# Altium PCB GNSS_FE_PROD.PcbDoc
Units mm, origin at the board's own origin, x right, y up, seen from the top; angles counter-clockwise.
Board outline 40 x 30 mm, 4 copper layers (TOP, GND1, GND2, BOTTOM), stack 1.586 mm thick; 19 components, 13 nets, 56 pads, 235 vias.
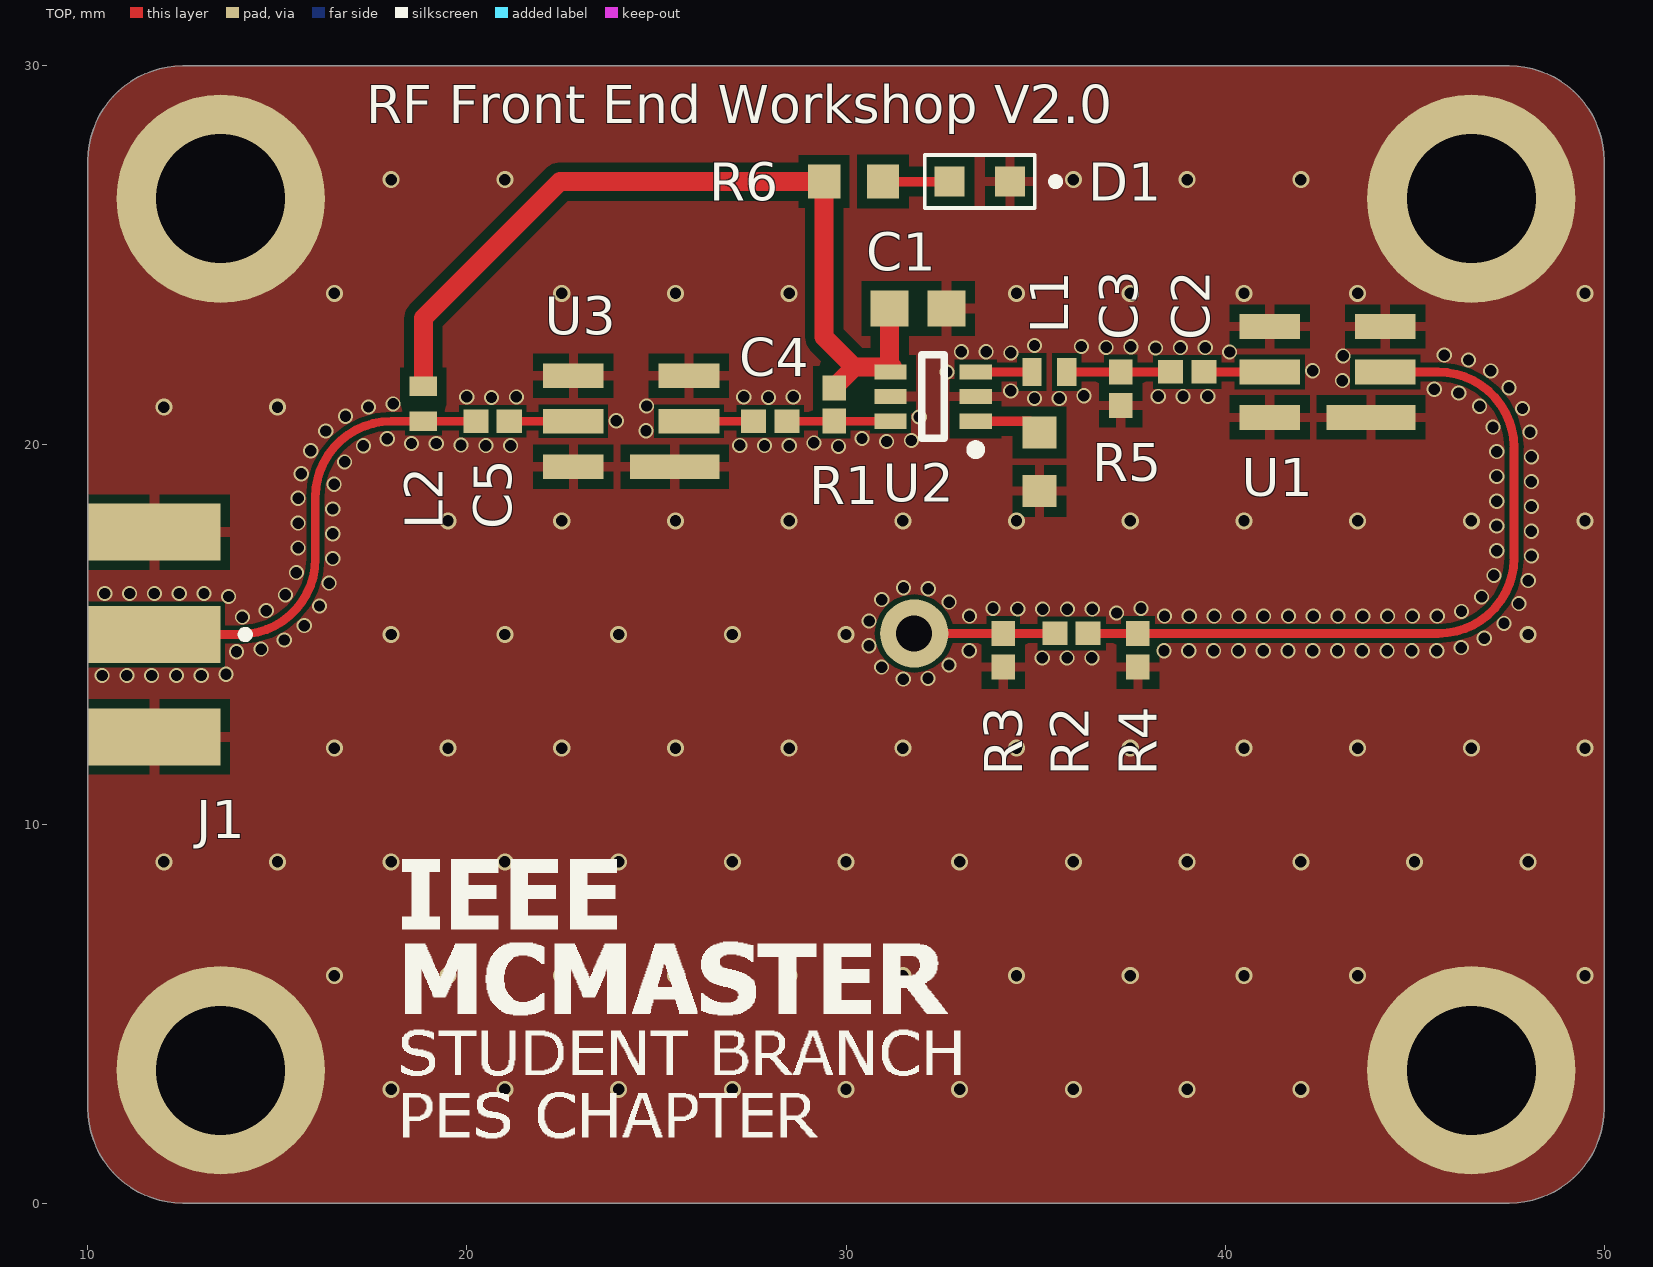
[diagram p0: TOP view]
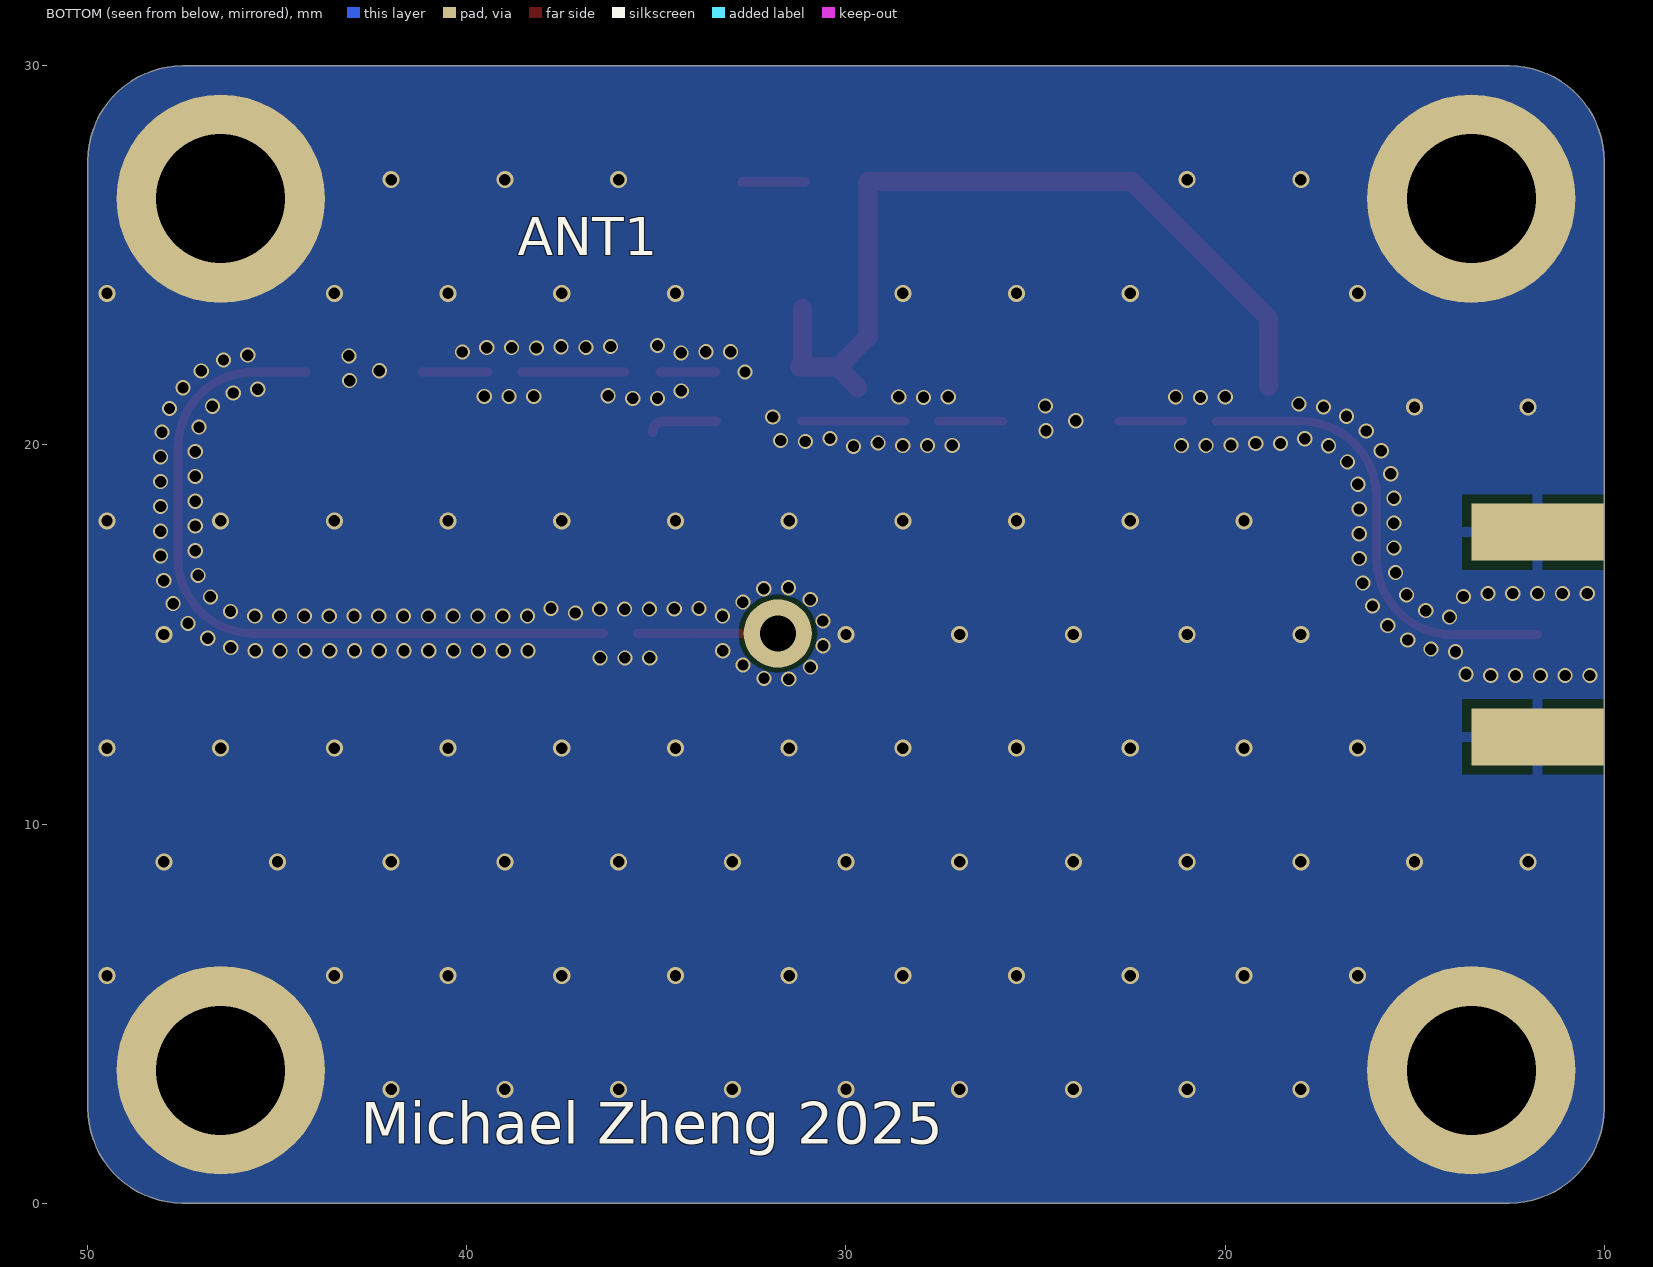
[diagram p1: BOTTOM view, seen from below]
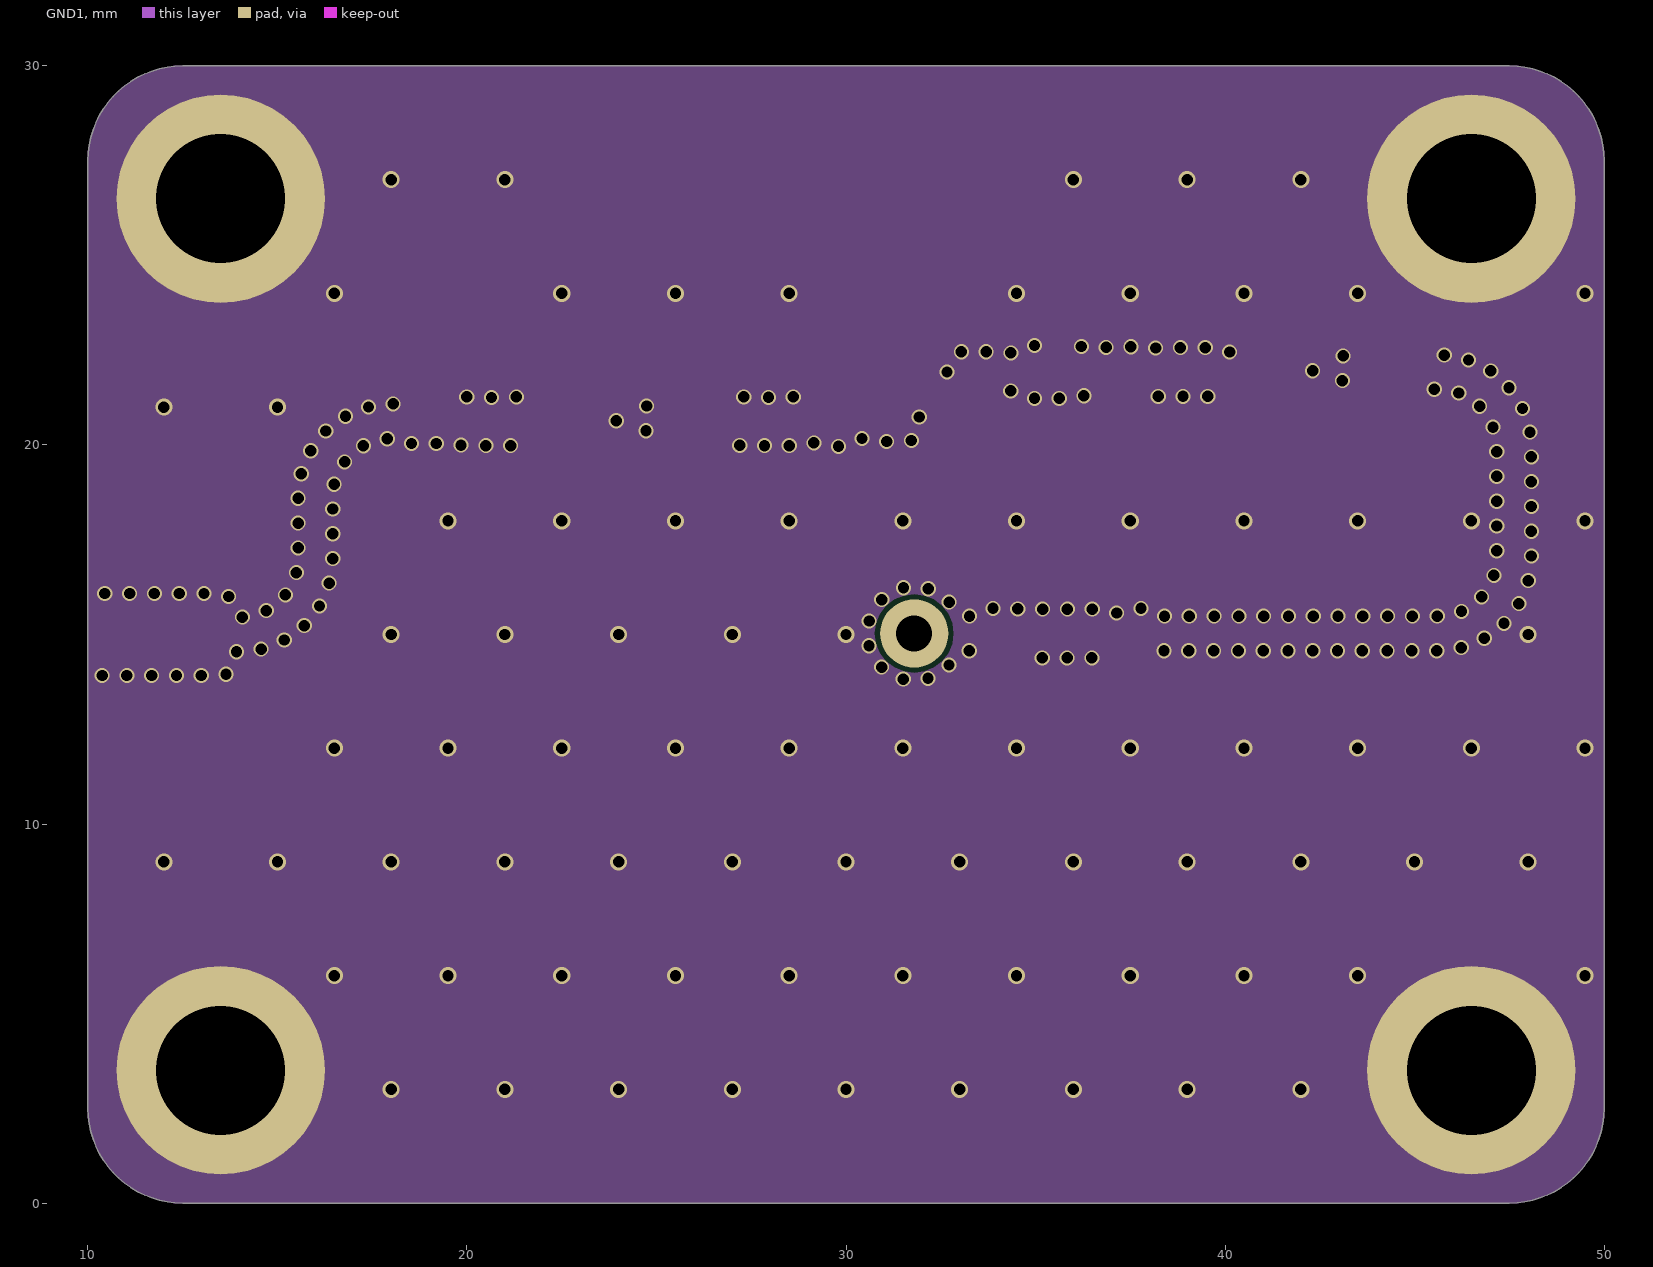
[diagram p2: GND1]
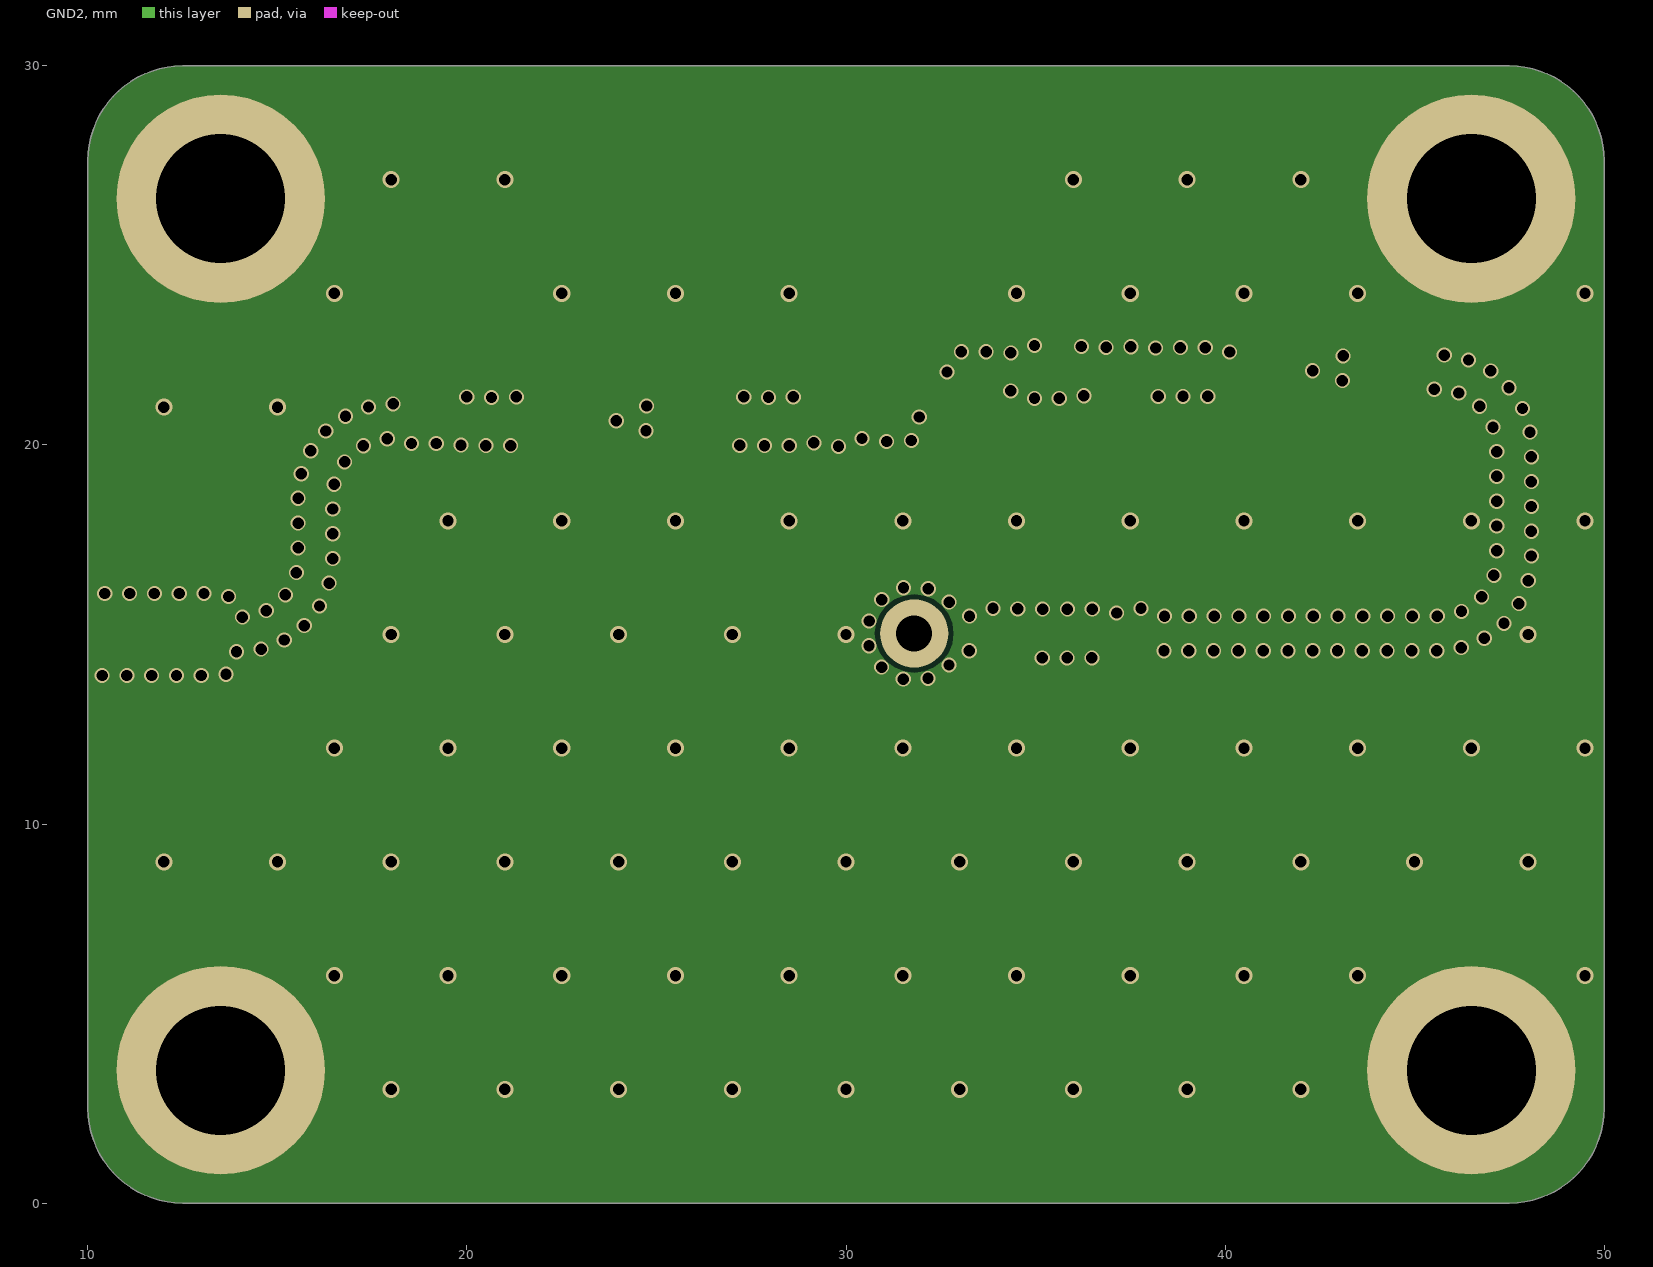
[diagram p3: GND2]
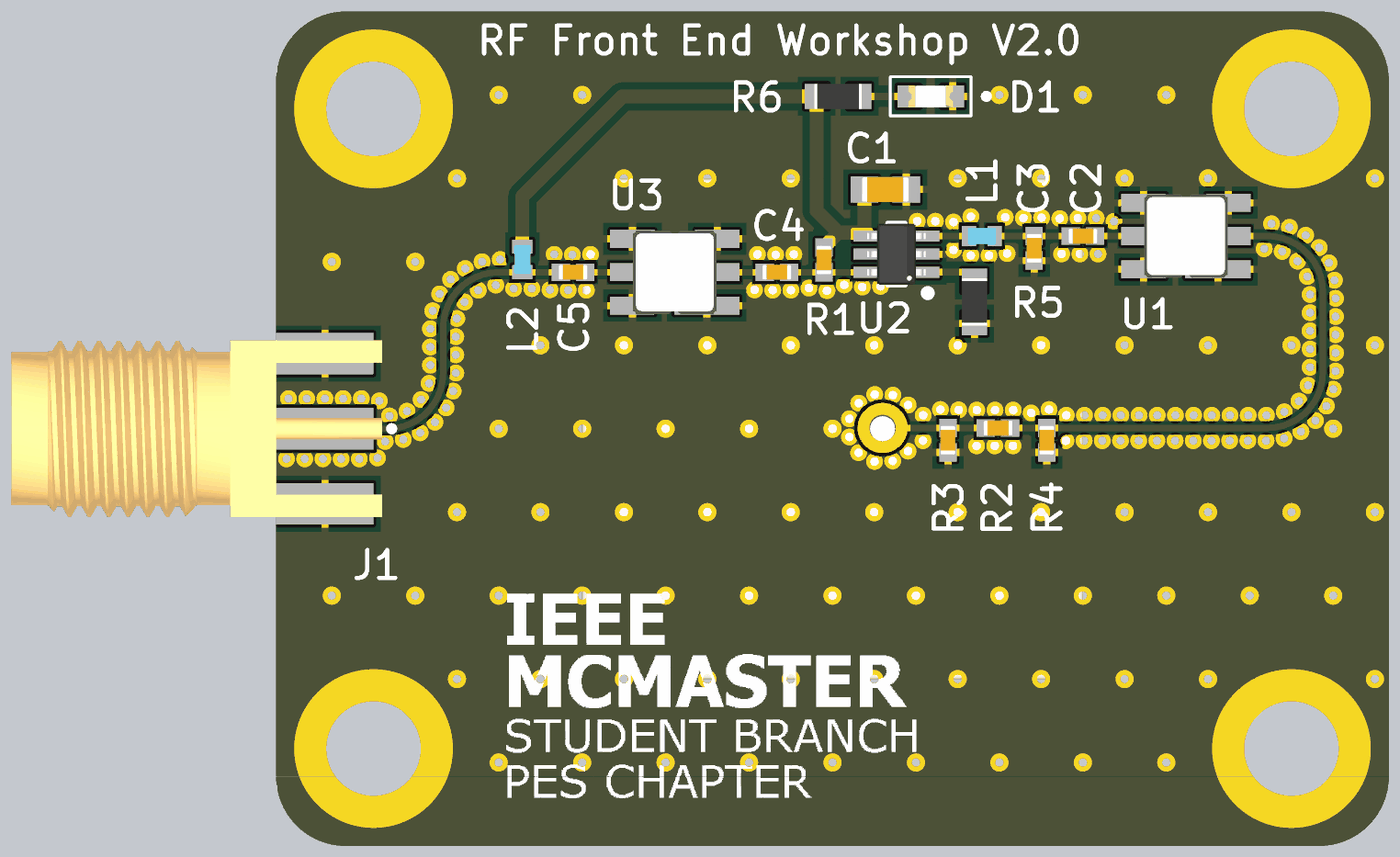
[diagram p4: 3D render of the assembled board from above, using the file's embedded part models]

## Layer stack, top to bottom
Top Solder: solder mask 0.0305, Solder Resist, Dk 3.8
TOP: signal copper 0.035
Dielectric 2: prepreg 0.2104, Core-024, Dk 4.4
GND1: signal copper 0.0152
Dielectric 1: core 1.065, Core-024, Dk 4.6
GND2: signal copper 0.0152
Dielectric 3: prepreg 0.2104, Core-024, Dk 4.4
BOTTOM: signal copper 0.035
Bottom Solder: solder mask 0.0305, Solder Resist, Dk 3.8

## Board outline
10,2.5 10,27.5 cw(c12.5,27.5) 12.5,30 47.5,30 cw(c47.5,27.5) 50,27.5 50,2.5 cw(c47.5,2.5) 47.5,0 12.5,0 cw(c12.5,2.5)

## Design rules (kind name [scope] priority, off if disabled: settings)
Clearance Clearance_RF [InNetClass('RF')] p1: gap=0.127 ignorepadtopadclearanceinfootprint=TRUE
Clearance [All] p2: gap=0.254 ignorepadtopadclearanceinfootprint=FALSE except(0.15: SMDPad-SMDPad)
HoleSize [All] p1: absolutevalues=TRUE maxlimit=5 minlimit=0.025 maxpercent=80.000 minpercent=20.000
MinimumSolderMaskSliver [All] p1: minsoldermaskwidth=0.13
PolygonConnect [All] p1: thpad.connectstyle=Relief thpad.reliefconductorwidth=0.254 thpad.reliefentries=4 thpad.polygonreliefangle="90 Angle" thpad.airgapwidth=0.254 thpad.conductorbypadedge=TRUE thpad.mindistance=0.381 thpad.enablemindistance=FALSE smdpad.connectstyle=Relief smdpad.reliefconductorwidth=0.254 smdpad.reliefentries=4 smdpad.polygonreliefangle="90 Angle" smdpad.airgapwidth=0.254 smdpad.conductorbypadedge=TRUE smdpad.mindistance=0.381 smdpad.enablemindistance=FALSE via.connectstyle=Direct via.reliefconductorwidth=0.254 via.reliefentries=4 via.polygonreliefangle="90 Angle" via.airgapwidth=0.254
RoutingVias [All] p1: holewidth=0.711 width=1.27 viastyle="Through Hole" minholewidth=0.3 minwidth=0.4 maxholewidth=0.711 maxwidth=1.27
SilkToSolderMaskClearance [IsPad] p1: minsilkscreentomaskgap=0.15 clearancetoexposedcopper=TRUE
SolderMaskExpansion [All] p1: expansion=0.102 istentingtop=FALSE
Width POWER [(InNet('GND') OR InNet('VCC'))] p1: maxlimit=0.5 minlimit=0.254 preferedwidth=0.5 minimp=50.000000 maximp=50.000000 favimp=50.000000
Width RF [InNetClass('RF')] p2: maxlimit=0.228 minlimit=0.181 preferedwidth=0.228 toplayer_minwidth=0.228 midlayer1_maxwidth=0.181 midlayer1_prefwidth=0.181 midlayer2_maxwidth=0.181 midlayer2_prefwidth=0.181 bottomlayer_minwidth=0.228 impedanceprofiledriven=TRUE impedanceprofileid={97FFBCBD-3325-4071-BD9D-E1329E5F0074} impedanceprofilevalue=50.000000 minimp=50.000000 maximp=50.000000 favimp=50.000000
Width [All] p3: maxlimit=0.254 minlimit=0.254 preferedwidth=0.254
27 further rules are at their usual default settings.

## Classes and differential pairs
net class RF: NetANT1_1 NetC2_1 NetC2_2 NetC4_1 NetC4_2 NetC5_1 NetC5_2 NetL1_1 NetR2_1

## Components (designator, comment, footprint, x,y, rotation, side; value= is the part's Value field where it differs from the comment)
ANT1 "[NO GND] ANT-GNSSCP-TH18L1" "[NO GND] ANT-GNSSCP-TH18L1" 30,15 r270 bottom locked
C1 "GCM188L81H104KA57D" CAP_MURATA_0603 31.9,23.6 r0 top
C2 "GRM1555C1H182JA01D" 0402_CAP 39.004,21.927 r180 top
C3 "GJM1555C1H1R5WB01D" 0402_CAP 37.25,21.487 r90 top
C4 "GJM1555C1H470FB01D" 0402_CAP 28,20.627 r180 top
C5 "GJM1555C1H8R1BB01D" 0402_CAP 20.675,20.627 r180 top
D1 "Red, 2V, 140°" WL-SMCW 33.529,26.95 r180 top
J1 "CON-SMA-EDGE-S" RFSOLUTIONS_CON-SMA-EDGE-S 11.75,15 r0 top
L1 "LQG15HN5N6C02D" INDC1006X60N 35.367,21.927 r0 top value=5.6nH
L2 "LQW15AN20NG8ZD" INDC1006X60N 18.85,21.087 r90 top value=20nH
R1 "RC0402FR-0710KL" 0402_CAP 29.693,21.067 r270 top
R2 "RC0402JR-070RL" 0402_CAP 35.95,15.027 r180 top
R3 "RC0402JR-070RL" 0402_CAP 34.15,14.587 r90 top
R4 "RC0402JR-070RL" 0402_CAP 37.704,14.587 r90 top
R5 "RC0402FR-07357RL" RC0603JR-070RL 35.102,19.558 r270 top
R6 "RC0603JR-070RL" RC0603JR-070RL 30.2,26.95 r0 top
U1 "B39162B3913U410" B39162B3913U410 42.704,21.927 r90 top
U2 "MAX2655EXT+T" MAX2655EXT+T 32.297,21.277 r180 top
U3 "B39162B3913U410" B39162B3913U410 24.331,20.627 r90 top

## Footprints (in the part's own frame and the unit in brackets; to place one, negate y for a bottom-side part, rotate by r counter-clockwise, add the part's x,y. Pads: shape width x height; smd on the part's side, far side on the other; paste and mask are expansions set on the pad)
0402_CAP [mm]
  rect 0.66x0.62 smd: 1(-0.44,0) 2(0.44,0)
  body extent -0.53,-0.28 0.53,0.28, height 0.55
"[NO GND] ANT-GNSSCP-TH18L1" [mm]
  round 1.8 hole 0.95: 1(-0.027,-1.8)
  body extent -9,-9 9,9, height 4.1
B39162B3913U410 [mm]
  rect 0.65x2.35 smd: 1(-1.2,-1.15)
  rect 0.65x1.6 smd: 2(0,-1.525) 3(1.2,-1.525) 4(1.2,1.525) 5(0,1.525) 6(-1.2,1.525)
  body extent -1.5,-1.5 1.5,1.5, height 1.1
CAP_MURATA_0603 [mm]
  rect 1x0.95 smd: 1(-0.75,0) 2(0.75,0)
  body extent -0.85,-0.45 0.85,0.45, height 0.9
INDC1006X60N [mm]
  rect 0.51x0.73 smd: 1(-0.46,0) 2(0.46,0)
  body extent -0.5,-0.3 0.5,0.3, height 0.6
MAX2655EXT+T [mm] "TSOP, 6-Leads, Body 2.00x1.25mm, Pitch 0.65mm, IPC Medium Density"
  rect 0.85x0.4 smd: 1(-1.125,0.65) 2(-1.125,0) 3(-1.125,-0.65) 4(1.125,-0.65) 5(1.125,0) 6(1.125,0.65)
  silkscreen extent -1.25,-1.1 0.3,1.52, body extent -1.05,-1.1 1.05,1.1, height 1.1
RC0603JR-070RL [mm] "Chip Resistor, 2-Leads, Body 1.60x0.80mm, IPC Medium Density"
  rect 0.85x0.9 smd: 1(-0.775,0) 2(0.775,0)
  body extent -0.85,-0.45 0.85,0.45, height 0.55
RFSOLUTIONS_CON-SMA-EDGE-S [mm]
  rect 3.5x1.5 smd: 1(0,0) 2(0,-2.7) 2(0,2.7)
  rect 3.5x1.5 smd far side: 2(0,-2.7) 2(0,2.7)
  silkscreen extent 2.3,-0.1 2.5,0.1, body extent -11.27,-3.17 2.06,3.17, height 3.55
WL-SMCW [mm]
  rect 0.8x0.8 smd: 1(-0.8,0) 2(0.8,0)
  silkscreen extent -2.07,-0.7 1.45,0.7, body extent -0.8,-0.4 0.8,0.4, height 0.7

## Part data
ANT1: "CERAMIC PATCH GNSS ANTENNA"
C1: "CAP CER 0.1UF 50V X8L 0603", Capacitance=0.1uF
C2: library part GRM1555C1H102JA01D, "CAP CER 1800PF 50V C0G/NP0 0402", Capacitance=1800pF
C3: library part GRM1555C1H102JA01D, "CAP CER 1.5PF 50V C0G/NP0 0402", Capacitance=1.5pF
C4: library part GRM1555C1H102JA01D, "CAP CER 47PF 50V C0G/NP0 0402", Capacitance=47pF
C5: library part GRM1555C1H102JA01D, "CAP CER 8.1PF 50V C0G/NP0 0402", Capacitance=8.1pF
D1: library part 150060RS75000, "WL-SMCW Mono-color Chip LED Waterclear, SMT, size 0603, Red, 2V, 140°", Case/Size Code=0603, Emitting Color=Red, Forward Voltage=2V, Manufacturer="Wurth Elektronik", Operating Temperature Max=85°C, Operating Temperature Min=-40°C, Category="Signal LEDs", Chip Technology=AlInGaP, ComponentLink1Description="Website Link", ComponentLink1URL=https://www.we-online.com/redexpert/article/150060RS75000?ad, ComponentLink2Description="Datasheet Link", ComponentLink2URL=https://www.we-online.com/redexpert/spec/150060RS75000?ad, Dominant Wavelength=625nm, Height=0.7mm, Length=1.6mm, Luminous Intensity=250mcd, Manufacturer Part Number=150060RS75000, Match Code=WL-SMCW, Mount="Surface Mount", Packaging="Tape and Reel", Peak Wavelength=630nm, Viewing Angle=140°, Width=0.8mm
J1: "CONN SMA JACK STR EDGE MNT"
L1: library part LQW15AN3N6C10D, "FIXED IND 5.6NH 600MA 0.18OHM SM", Package=None, Availability=Unavailable, MP=LQW15AN3N6C10D, Price=None
L2: library part LQW15AN3N6C10D, "FIXED IND 20NH 800MA 0.186OHM SM", Package=None, Availability=Unavailable, MP=LQW15AN3N6C10D, Price=None
R1: library part RC0402JR-070RL, "RES 10K OHM 1% 1/16W 0402", Case Code (Imperial)=0603, Case Code (Metric)=1608, Manufacturer=Yageo, Max Operating Temperature=155degC, Min Operating Temperature=-55degC, Package Description="2-Pin Surface Mount Device, Body 1.6 x 0.8 mm", Package Quantity=5000, Power Rating=100mW, Resistance=10kΩ, Temperature Coefficient=200ppm/degreesC, Tolerance=5%, Voltage Rating=50V, Case/Package=0603, Composition=ThickFilm, Contact Plating=Tin, Datasheet URL=http://www.yageo.com/NewPortal/yageodocoutput?fileName=/pdf/R-Chip/PYu-RC_Group_51_RoHS_L_5.pdf, Datasheet Version="Rev. 5, 10/2016", Depth=0.8mm, Height=0.45mm, Lead Free=LeadFree, Length=1.6mm, Manufacturer URL=http://www.yageo.com/, Military Standard=Not, Number of Pins=2, Package Reference=0603, Packaging=TapeandReel, Radiation Hardening=No, REACH SVHC=NoSVHC, RoHSCompliant=true, Termination=SMD/SMT, Voltage Rating (DC)=50V, Width=0.8mm
R2 R3 R4: "RES 0 OHM JUMPER 1/16W 0402", Case Code (Imperial)=0603, Case Code (Metric)=1608, Manufacturer=Yageo, Max Operating Temperature=155degC, Min Operating Temperature=-55degC, Package Description="2-Pin Surface Mount Device, Body 1.6 x 0.8 mm", Package Quantity=5000, Power Rating=100mW, Resistance=0mOhm, Temperature Coefficient=200ppm/degreesC, Tolerance=5%, Voltage Rating=50V, Case/Package=0603, Composition=ThickFilm, Contact Plating=Tin, Datasheet URL=http://www.yageo.com/NewPortal/yageodocoutput?fileName=/pdf/R-Chip/PYu-RC_Group_51_RoHS_L_5.pdf, Datasheet Version="Rev. 5, 10/2016", Depth=0.8mm, Height=0.45mm, Lead Free=LeadFree, Length=1.6mm, Manufacturer URL=http://www.yageo.com/, Military Standard=Not, Number of Pins=2, Package Reference=0603, Packaging=TapeandReel, Radiation Hardening=No, REACH SVHC=NoSVHC, RoHSCompliant=true, Termination=SMD/SMT, Voltage Rating (DC)=50V, Width=0.8mm
R5: library part RC0603JR-070RL, "RES 357 OHM 1% 1/16W 0402", Case Code (Imperial)=0603, Case Code (Metric)=1608, Manufacturer=Yageo, Max Operating Temperature=155degC, Min Operating Temperature=-55degC, Package Description="2-Pin Surface Mount Device, Body 1.6 x 0.8 mm", Package Quantity=5000, Power Rating=100mW, Resistance=357Ω, Temperature Coefficient=200ppm/degreesC, Tolerance=5%, Voltage Rating=50V, Case/Package=0603, Composition=ThickFilm, Contact Plating=Tin, Datasheet URL=http://www.yageo.com/NewPortal/yageodocoutput?fileName=/pdf/R-Chip/PYu-RC_Group_51_RoHS_L_5.pdf, Datasheet Version="Rev. 5, 10/2016", Depth=0.8mm, Height=0.45mm, Lead Free=LeadFree, Length=1.6mm, Manufacturer URL=http://www.yageo.com/, Military Standard=Not, Number of Pins=2, Package Reference=0603, Packaging=TapeandReel, Radiation Hardening=No, REACH SVHC=NoSVHC, RoHSCompliant=true, Termination=SMD/SMT, Voltage Rating (DC)=50V, Width=0.8mm
R6: "Chip Resistor, 0 Ohm, +/- 5%, 0.1 W, -55 to 155 degC, 0603 (1608 Metric), RoHS, Tape and Reel", Case Code (Imperial)=0603, Case Code (Metric)=1608, Manufacturer=Yageo, Max Operating Temperature=155degC, Min Operating Temperature=-55degC, Package Description="2-Pin Surface Mount Device, Body 1.6 x 0.8 mm", Package Quantity=5000, Power Rating=100mW, Resistance=0mOhm, Temperature Coefficient=200ppm/degreesC, Tolerance=5%, Voltage Rating=50V, Case/Package=0603, Composition=ThickFilm, Contact Plating=Tin, Datasheet URL=http://www.yageo.com/NewPortal/yageodocoutput?fileName=/pdf/R-Chip/PYu-RC_Group_51_RoHS_L_5.pdf, Datasheet Version="Rev. 5, 10/2016", Depth=0.8mm, Height=0.45mm, Lead Free=LeadFree, Length=1.6mm, Manufacturer URL=http://www.yageo.com/, Military Standard=Not, Number of Pins=2, Package Reference=0603, Packaging=TapeandReel, Radiation Hardening=No, REACH SVHC=NoSVHC, RoHSCompliant=true, Termination=SMD/SMT, Voltage Rating (DC)=50V, Width=0.8mm
U1 U3: "FILTER SAW 1.588GHZ 6SMD"
U2: "IC AMP GPS 1.4GHZ-1.7GHZ SC70-6"

## Free pads (board coordinates)
  round 5.5 hole 3.4: ""(13.5,3.5) ""(13.5,26.5) ""(46.5,3.5) ""(46.5,26.5)

## Via types
v1: diameter 0.4, hole 0.3, TOP to BOTTOM, 157 vias
v2: diameter 0.45, hole 0.3, TOP to BOTTOM, 78 vias

## Nets (pads, with @x,y where several pads share a name; then routed paths per layer and width w, separated by ;. In a path a pad name is that pad's centre, name@x,y a point inside that pad or via, vN(x,y) a via of type N, cw(c..) or ccw(c..) an arc to the next point about the centre after c; other vN are vias at no path point)
GND: C1.2 C3.1 D1.1 J1.2 pad. R3.1 R4.1 R5.2 U1.1 U1.3 U1.4 U1.6 U2.2 U2.5 U3.1 U3.3 U3.4 U3.6
  other v1: 31.511,13.823 32.165,13.843 10.372,13.917 11.026,13.917 11.68,13.917 12.334,13.917 12.988,13.917 13.641,13.951 30.939,14.139 32.716,14.195 35.18,14.384 35.834,14.384 36.488,14.384 13.918,14.543 33.252,14.57 38.391,14.57 39.045,14.57 39.699,14.57 40.353,14.57 41.007,14.57 41.661,14.57 42.315,14.57 42.969,14.57 43.623,14.57 44.277,14.57 44.931,14.57 45.585,14.57 14.568,14.615 46.234,14.653 30.607,14.703 15.177,14.854 46.84,14.9 15.708,15.235 47.362,15.293 30.609,15.357 14.073,15.46 33.259,15.484 38.404,15.484 39.058,15.484 39.712,15.484 40.366,15.484 41.02,15.484 41.674,15.484 42.328,15.484 42.982,15.484 43.636,15.484 44.29,15.484 44.944,15.484 45.598,15.484 37.141,15.567 14.704,15.63 46.24,15.609 34.534,15.676 35.188,15.67 35.842,15.67 36.496,15.67 33.88,15.69 37.784,15.69 16.108,15.753 47.755,15.816 32.72,15.854 30.943,15.919 13.709,16.004 46.77,15.992 15.209,16.046 10.444,16.083 11.098,16.083 11.752,16.083 12.406,16.083 13.06,16.083 32.17,16.209 31.517,16.233 16.362,16.355 48.001,16.422 47.094,16.56 15.498,16.633 16.457,17.002 48.084,17.071 47.17,17.21 15.543,17.285 16.457,17.656 48.084,17.725 47.17,17.864 15.543,17.939 16.457,18.31 48.084,18.379 47.17,18.518 15.543,18.593 16.493,18.963 48.084,19.033 47.17,19.172 15.629,19.241 16.77,19.556 48.084,19.687 15.877,19.847 47.17,19.826 29.801,19.964 17.267,19.981 19.843,19.996 20.497,19.984 21.151,19.984 27.196,19.99 27.85,19.984 28.504,19.984 18.537,20.039 19.191,20.039 29.154,20.057 31.071,20.094 31.724,20.119 17.895,20.164 30.421,20.17 48.046,20.34 16.271,20.368 24.722,20.376 47.071,20.472 23.939,20.639 16.796,20.759 31.931,20.739 47.848,20.963 17.402,21.003 24.738,21.03 46.719,21.023 18.051,21.084 34.972,21.229 35.626,21.229 19.994,21.27 20.648,21.254 21.302,21.27 27.302,21.27 27.956,21.257 28.609,21.27 38.237,21.284 38.891,21.284 39.545,21.284 36.276,21.299 46.166,21.373 34.349,21.427 45.519,21.47 47.493,21.512 43.096,21.698 32.664,21.928 47.011,21.955 42.313,21.96 46.424,22.243 43.116,22.352 45.783,22.371 34.35,22.43 33.043,22.46 33.697,22.46 40.121,22.454 38.17,22.558 36.863,22.575 37.517,22.59 38.824,22.57 39.478,22.57 36.209,22.6 34.974,22.625
  other v2: 18,3 21,3 24,3 27,3 30,3 33,3 36,3 39,3 42,3 16.5,6 19.5,6 22.5,6 25.5,6 28.5,6 31.5,6 34.5,6 37.5,6 40.5,6 43.5,6 49.5,6 12,9 15,9 18,9 21,9 24,9 27,9 30,9 33,9 36,9 39,9 42,9 45,9 48,9 16.5,12 19.5,12 22.5,12 25.5,12 28.5,12 31.5,12 34.5,12 37.5,12 40.5,12 43.5,12 46.5,12 49.5,12 18,15 21,15 24,15 27,15 30,15 48,15 19.5,18 22.5,18 25.5,18 28.5,18 31.5,18 34.5,18 37.5,18 40.5,18 43.5,18 46.5,18 49.5,18 12,21 15,21 16.5,24 22.5,24 25.5,24 28.5,24 34.5,24 37.5,24 40.5,24 43.5,24 49.5,24 18,27 21,27 36,27 39,27 42,27
NetANT1_1: ANT1.1 R2.2 R3.2 | length 3.7
  TOP w0.228: ANT1.1@31.8,15 ANT1.1@31.813,15.014 ; ANT1.1@31.813,15.027 R3.2@34.137,15.027 ; R3.2@34.137,15.014 R3.2 R2.2
NetC2_1: C2.1 U1.5 | length 1.7
  TOP w0.228: C2.1 U1.5
NetC2_2: C2.2 C3.2 L1.2 | length 2.7
  TOP w0.228: L1.2 C3.2 C2.2
NetC4_1: C4.1 R1.2 U2.6 | length 2.7
  TOP w0.228: C4.1 R1.2 U2.6
NetC4_2: C4.2 U3.2 | length 1.7
  TOP w0.228: U3.2 C4.2
NetC5_1: C5.1 U3.5 | length 1.7
  TOP w0.228: C5.1 U3.5
NetC5_2: C5.2 J1.1 L2.1 | length 12.4
  TOP w0.228: J1.1 14,15 ccw(c14,17) 16,17 16,18.627 cw(c18,18.627) 18,20.627 L2.1 C5.2
NetD1_2: D1.2 R6.2 | length 1.7
  TOP w0.254: R6.2@31.075,26.95 D1.2
NetL1_1: L1.1 U2.3 | length 1.5
  TOP w0.228: U2.3 L1.1
NetR2_1: R2.1 R4.2 U1.2 | length 19.8
  TOP w0.228: R2.1 R4.2 45.627,15.027 ccw(c45.627,17.027) 47.627,17.027 47.627,19.927 ccw(c45.627,19.927) 45.627,21.927 U1.2
NetR5_1: R5.1 U2.1 | length 1.8
  TOP w0.254: U2.1 34.807,20.627 cw(c34.807,20.333) R5.1
VCC: C1.1 L2.2 R1.1 R6.1 U2.4 | length 22.4
  TOP w0.5: L2.2 18.85,23.35 22.45,26.95 R6.1 29.425,22.846 30.219,22.053 ; R1.1 29.693,21.527 30.219,22.053 ; C1.1 31.15,22.132 31.229,22.053 30.219,22.053

## Polygon pours and split planes (outlines as drawn)
GND on GND1 "GND1-GND" (solid, pour order 2): 10,2.5 10,27.5 cw(c12.5,27.5) 12.5,30 47.5,30 cw(c47.5,27.5) 50,27.5 50,2.5 cw(c47.5,2.5) 47.5,0 12.5,0 cw(c12.5,2.5)
GND on GND2 "GND2-GND" (solid, pour order 3): 10,2.5 10,27.5 cw(c12.5,27.5) 12.5,30 47.5,30 cw(c47.5,27.5) 50,27.5 50,2.5 cw(c47.5,2.5) 47.5,0 12.5,0 cw(c12.5,2.5)
GND on BOTTOM "BOTTOM-GND" (solid, pour order 4): 10,2.5 10,27.5 cw(c12.5,27.5) 12.5,30 47.5,30 cw(c47.5,27.5) 50,27.5 50,2.5 cw(c47.5,2.5) 47.5,0 12.5,0 cw(c12.5,2.5)
GND on TOP "TOP-GND" (solid, pour order 0): 10,2.5 10,27.5 cw(c12.5,27.5) 12.5,30 47.5,30 cw(c47.5,27.5) 50,27.5 50,2.5 cw(c47.5,2.5) 47.5,0 12.5,0 cw(c12.5,2.5)

## Silkscreen, mask and mechanical layers (free items; w line width, h text height)
Top Overlay:
  drawing of 35 lines, arcs and shapes, not listed
  text "RF Front End Workshop V2.0" at 17.337,28.486 h1
Bottom Overlay:
  text "Michael Zheng 2025" at 42.8,1.567 h1.1
Mechanical 1:
  lines w0.254: 10,0 50,0 50,30 10,30 10,0